# Altium PCB test pcb.PcbDoc
Units mm, origin at the board's own origin, x right, y up, seen from the top; angles counter-clockwise.
Board outline 100 x 100 mm, 2 copper layers (Top Layer, Bottom Layer); 1 components, 0 nets, 88 pads, 6 vias.
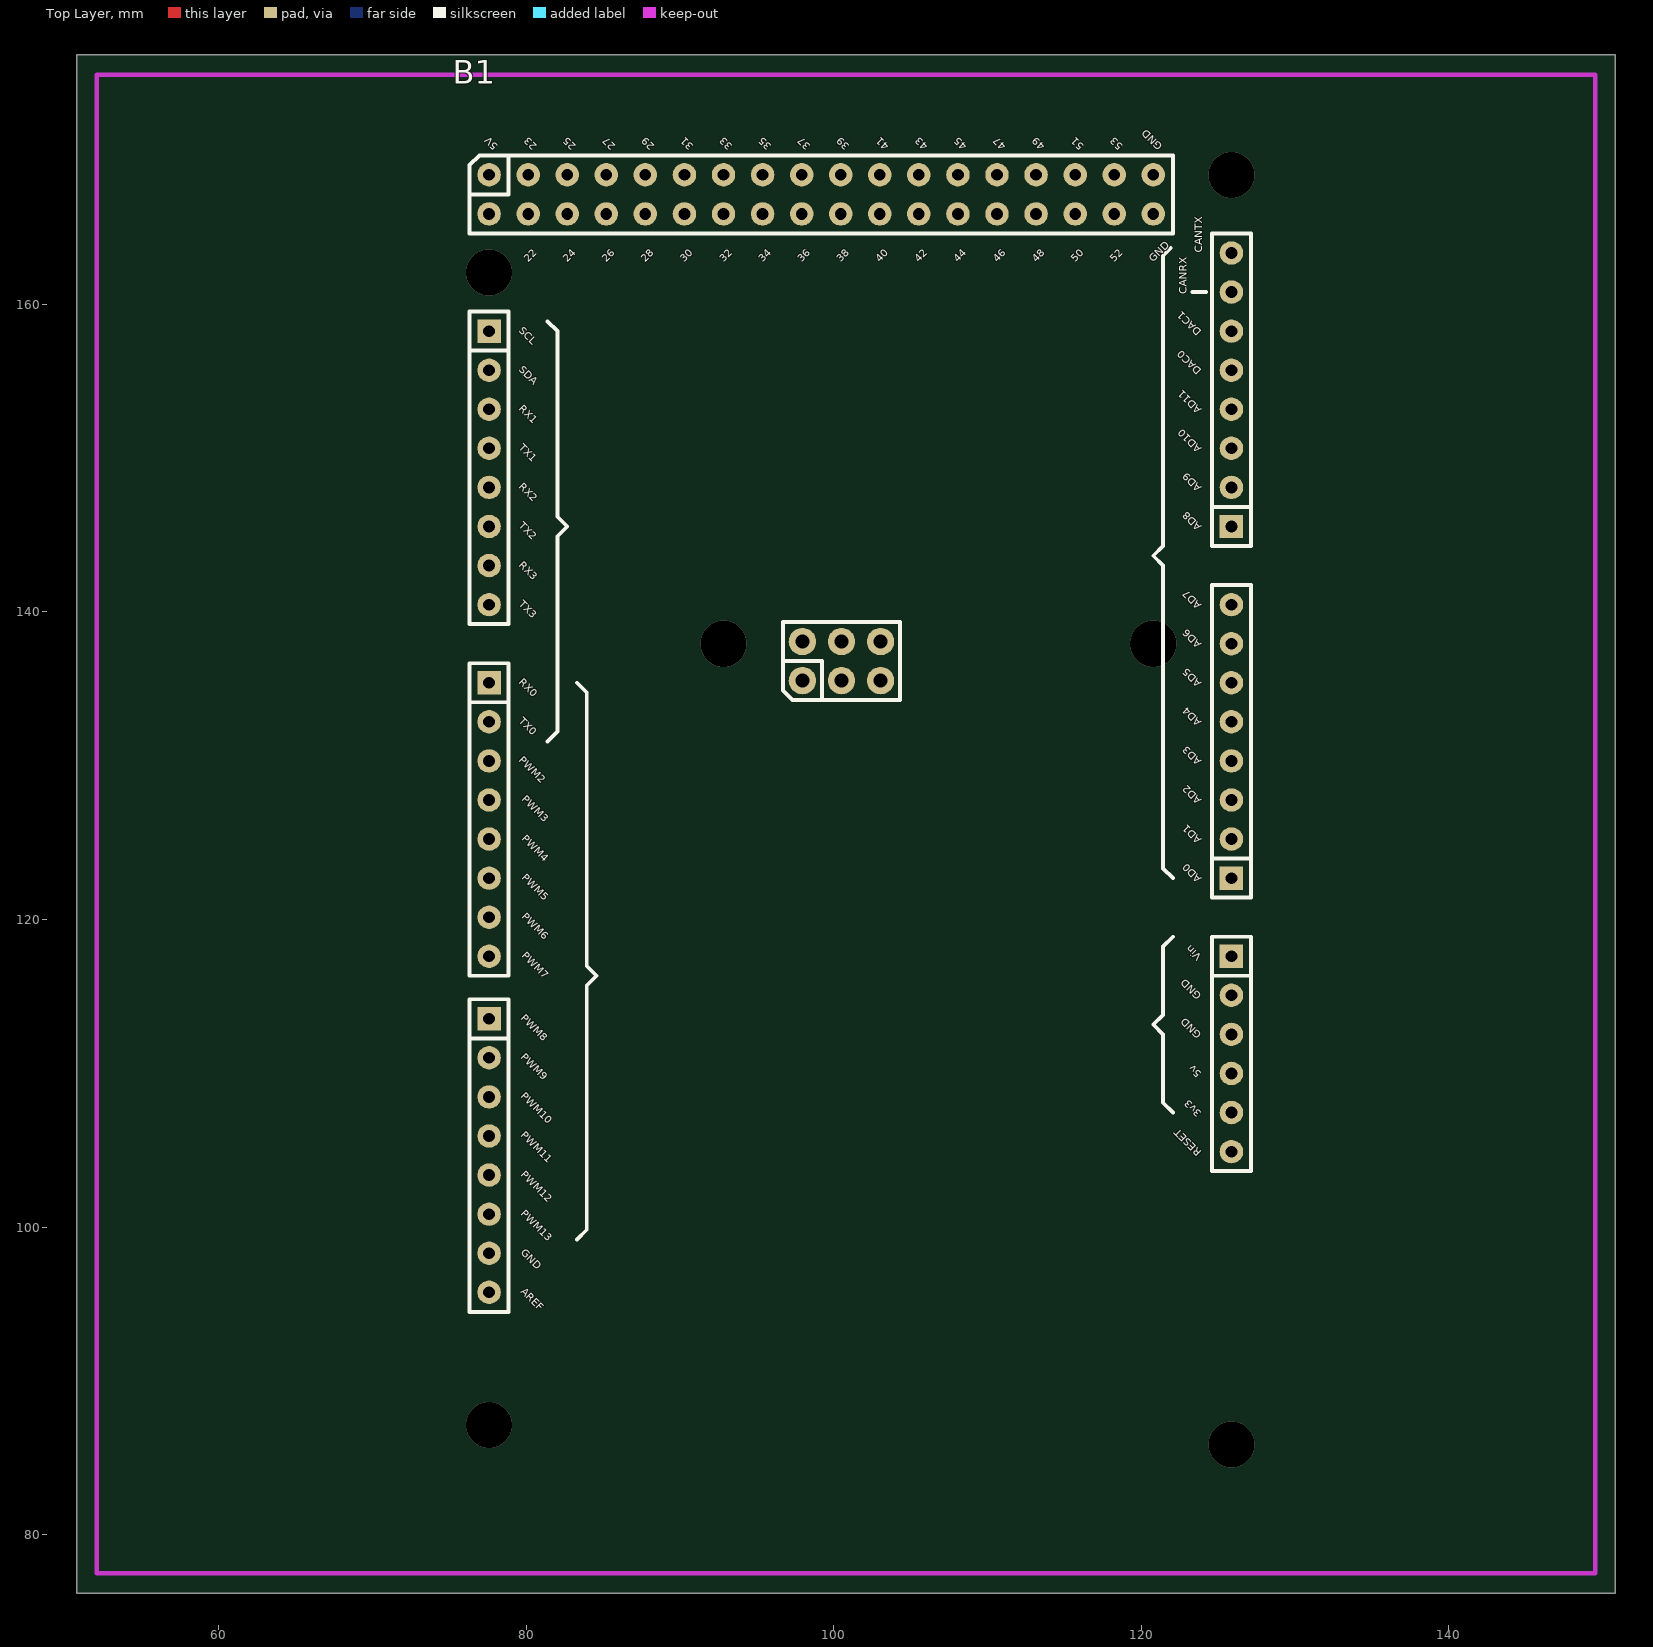
[diagram p0: Top Layer view]
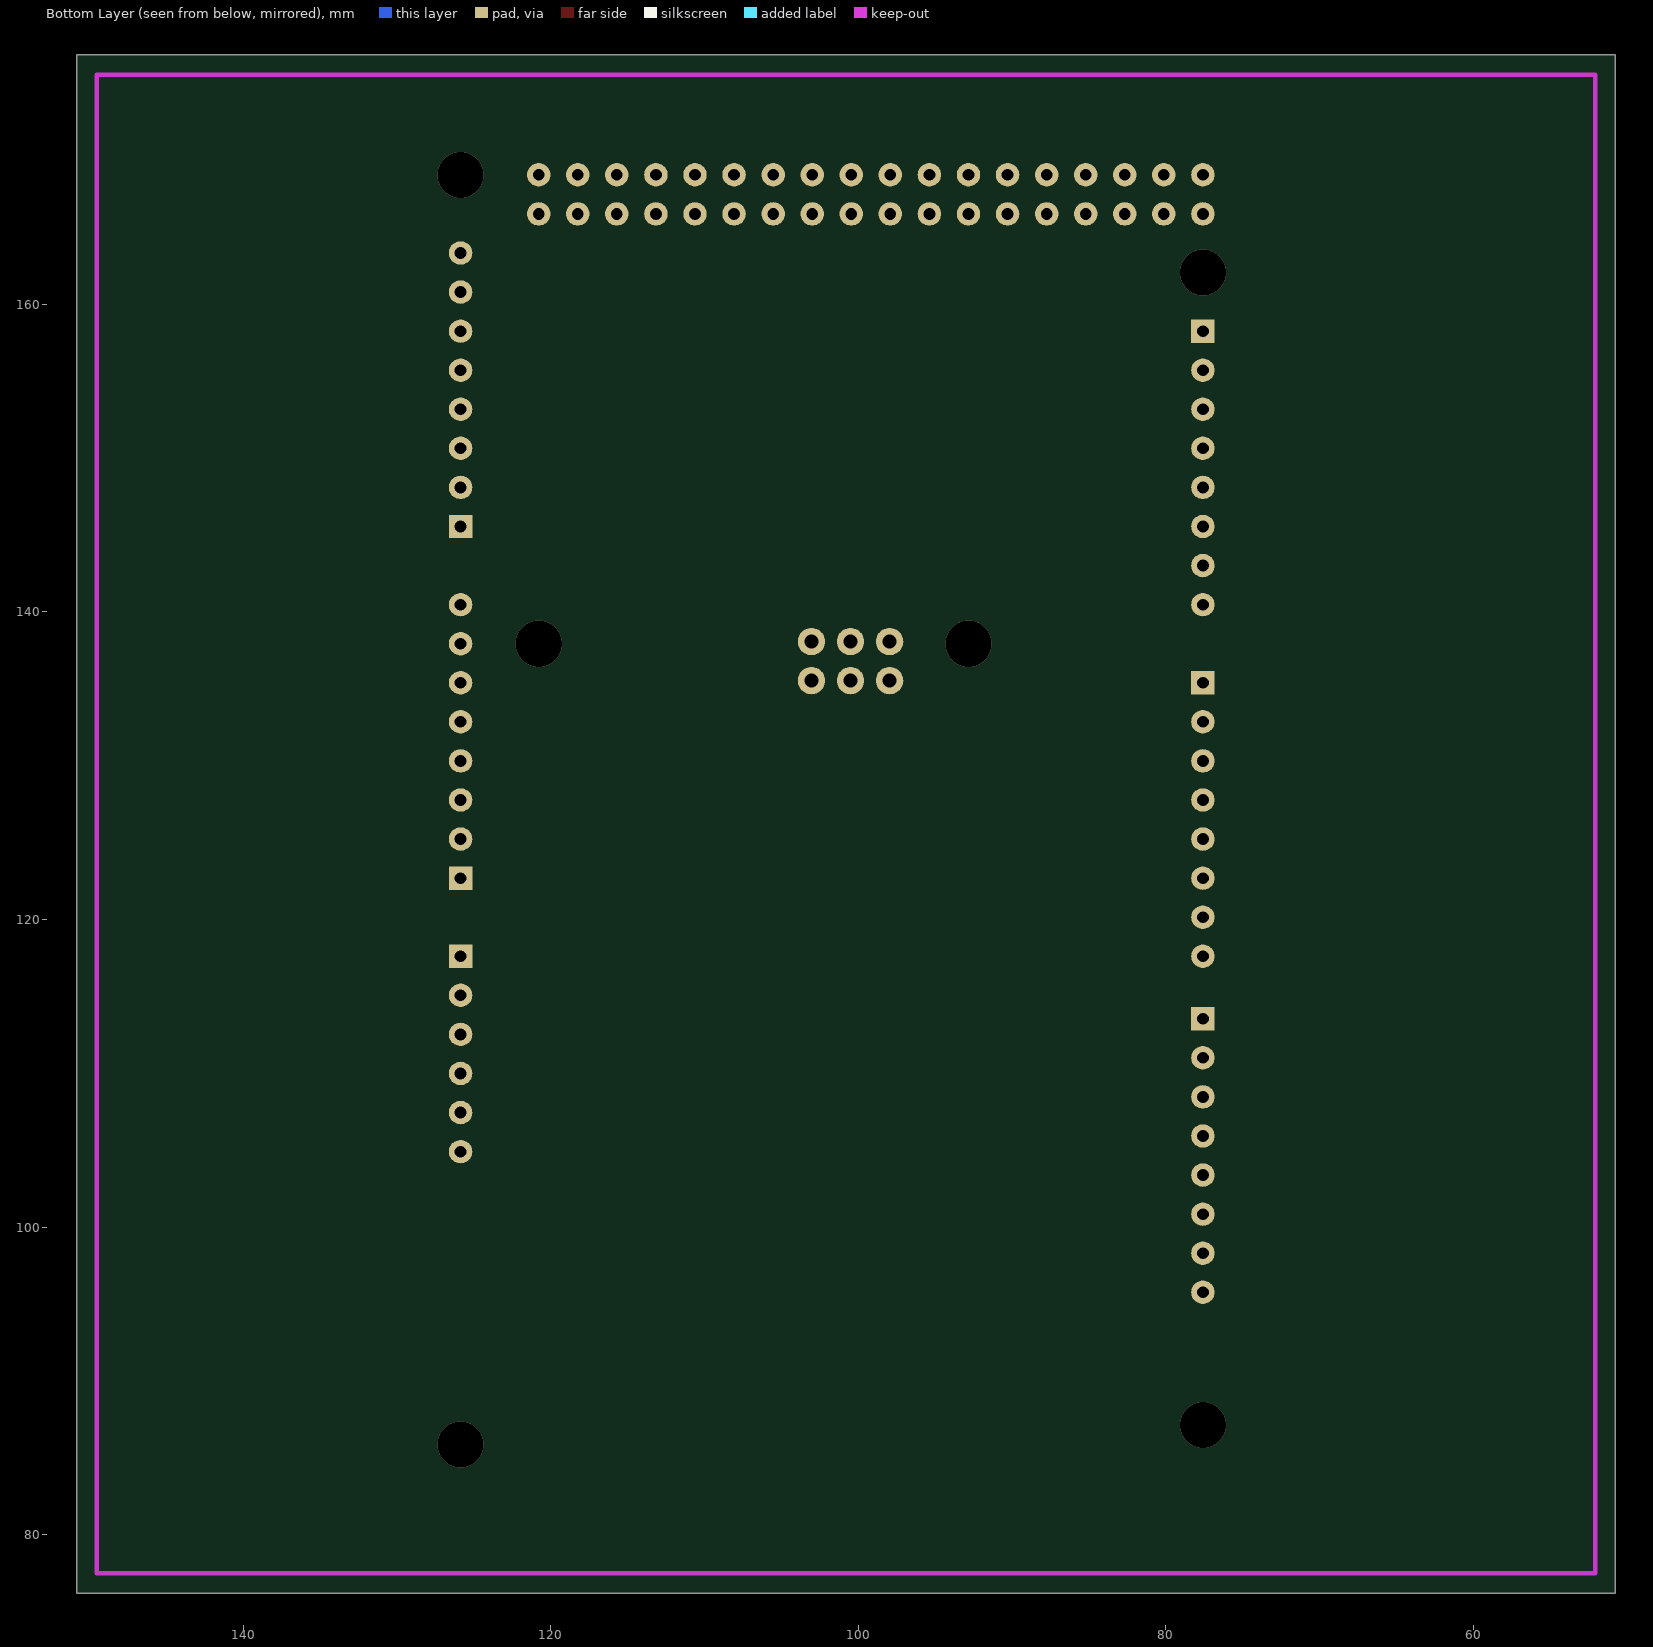
[diagram p1: Bottom Layer view, seen from below]

## Layer stack, top to bottom
Top Solder: solder mask 0.0102, Solder Resist, Dk 3.5
Top Layer: signal copper 0.0356
Dielectric 1: dielectric 0.32, FR-4, Dk 4.8
Bottom Layer: signal copper 0.0356
Bottom Solder: solder mask 0.0102, Solder Resist, Dk 3.5

## Board outline
50.8,76.2 150.8,76.2 150.8,176.2 50.8,176.2

## Design rules (kind name [scope] priority, off if disabled: settings)
Clearance [All] p1: gap=0.2 ignorepadtopadclearanceinfootprint=FALSE
PolygonConnect [All] p1: connectstyle=Relief reliefconductorwidth=0.254 reliefentries=4 polygonreliefangle="90 Angle" airgapwidth=0.254
RoutingVias [All] p1: holewidth=0.6 width=1 viastyle="Through Hole" minholewidth=0.711 minwidth=1.27 maxholewidth=0.711 maxwidth=1.27
SolderMaskExpansion [All] p1: expansion=0.102
Width [All] p1: maxlimit=0.2 minlimit=0.2 preferedwidth=0.2
30 further rules are at their usual default settings.

## Components (designator, comment, footprint, x,y, rotation, side; value= is the part's Value field where it differs from the comment)
B1 "arduino due" PCBComponent_1 101.727,132.08 r90 top

## Footprints (in the part's own frame and the unit in brackets; to place one, negate y for a bottom-side part, rotate by r counter-clockwise, add the part's x,y. Pads: shape width x height; smd on the part's side, far side on the other; paste and mask are expansions set on the pad)
PCBComponent_1 [mil]
  rect 60x60 hole 30: 0(130,950) 8(-730,950) 21(1030,950) 59(-570,-950) 60(-370,-950) 68(530,-950)
  round 60 hole 30: 1(30,950) 2(-70,950) 3(-170,950) 4(-270,950) 5(-370,950) 6(-470,950) 7(-570,950) 9(-830,950) 10(-930,950) 11(-1030,950) 12(-1130,950) 13(-1230,950) 14(330,950) 15(430,950) 16(530,950) 17(630,950) 18(730,950) 19(830,950) 20(930,950) 22(1330,850) 23(1430,850) 24(1330,750) 25(1430,750) 26(1330,650) 27(1430,650) 28(1330,550) 29(1430,550) 30(1330,450) 31(1430,450) 32(1330,350) 33(1430,350) 34(1330,250) 35(1430,250) 36(1330,150) 37(1430,150) 38(1330,50) 39(1430,50) 40(1330,-50) 41(1430,-50) 42(1330,-150) 43(1430,-150) 44(1330,-250) 45(1430,-250) 46(1330,-350) 47(1430,-350) 48(1330,-450) 49(1430,-450) 50(1330,-550) 51(1430,-550) 52(1330,-650) 53(1430,-650) 54(-1070,-950) 55(-970,-950) 56(-870,-950) 57(-770,-950) 58(-670,-950) 61(-270,-950) 62(-170,-950) 63(-70,-950) 64(30,-950) 65(130,-950) 66(230,-950) 67(330,-950) 69(630,-950) 70(730,-950) 71(830,-950) 72(930,-950) 73(1030,-950) 74(1130,-950) 75(1230,-950) 76(-1330,950) 77(-1430,950) 78(1330,-750) 79(1430,-750) 80(1330,950) 81(1430,950)
  round 70 hole 35.43: 82(135.51,148.03) 83(235.51,148.03) 84(135.51,48.03) 85(235.51,48.03) 86(135.51,-51.97) 87(235.51,-51.97)
  silkscreen extent -1480,-1000 1480,1000, body extent -1480,-1000 1480,1000, height 485

## Via types
v1: diameter 3, hole 3, Top Layer to Bottom Layer, 6 vias

## Nets (pads, with @x,y where several pads share a name; then routed paths per layer and width w, separated by ;. In a path a pad name is that pad's centre, name@x,y a point inside that pad or via, vN(x,y) a via of type N, cw(c..) or ccw(c..) an arc to the next point about the centre after c; other vN are vias at no path point)
pads on no net: B1.0 B1.1 B1.2 B1.3 B1.4 B1.5 B1.6 B1.7 B1.8 B1.9 B1.10 B1.11 B1.12 B1.13 B1.14 B1.15 B1.16 B1.17 B1.18 B1.19 B1.20 B1.21 B1.22 B1.23 B1.24 B1.25 B1.26 B1.27 B1.28 B1.29 B1.30 B1.31 B1.32 B1.33 B1.34 B1.35 B1.36 B1.37 B1.38 B1.39 B1.40 B1.41 B1.42 B1.43 B1.44 B1.45 B1.46 B1.47 B1.48 B1.49 B1.50 B1.51 B1.52 B1.53 B1.54 B1.55 B1.56 B1.57 B1.58 B1.59 B1.60 B1.61 B1.62 B1.63 B1.64 B1.65 B1.66 B1.67 B1.68 B1.69 B1.70 B1.71 B1.72 B1.73 B1.74 B1.75 B1.76 B1.77 B1.78 B1.79 B1.80 B1.81 B1.82 B1.83 B1.84 B1.85 B1.86 B1.87
copper on no net:
  other v1: 125.857,85.852 77.597,87.122 92.837,137.922 120.777,137.922 77.597,162.052 125.857,168.402

## Keep-outs
Keep-Out Layer:
  lines w0.3: 52.1,77.5 52.1,174.9 149.5,174.9 149.5,77.5 52.1,77.5

## Silkscreen, mask and mechanical layers (free items; w line width, h text height)
Drill Drawing:
  text ".LEGEND" at 155.88,81.28 h1.52
  text "Drill Drawing." at 155.88,78.74 h1.52

## Dimensions
52.1,77.5 to 52.1,174.9 on Mechanical 1
52.1,77.5 to 149.5,77.5 on Mechanical 1

## Text inside footprints (layer, text, board x,y; h text height)
B1: Top Overlay "AREF" at 79.629,95.758 h0.51 r315; Top Overlay "GND" at 79.629,98.298 h0.51 r315; Top Overlay "PWM13" at 79.629,100.838 h0.51 r315; Top Overlay "PWM12" at 79.629,103.378 h0.51 r315; Top Overlay "PWM11" at 79.629,105.918 h0.51 r315; Top Overlay "PWM10" at 79.629,108.458 h0.51 r315; Top Overlay "PWM9" at 79.629,110.998 h0.51 r315; Top Overlay "PWM8" at 79.629,113.538 h0.51 r315; Top Overlay "PWM7" at 79.682,117.602 h0.51 r315; Top Overlay "PWM6" at 79.682,120.142 h0.51 r315; Top Overlay "PWM5" at 79.682,122.682 h0.51 r315; Top Overlay "PWM4" at 79.682,125.222 h0.51 r315; Top Overlay "PWM3" at 79.682,127.762 h0.51 r315; Top Overlay "PWM2" at 79.502,130.302 h0.51 r315; Top Overlay "TX0" at 79.502,132.842 h0.51 r315; Top Overlay "TX3" at 79.502,140.462 h0.51 r315; Top Overlay "RX3" at 79.502,143.002 h0.51 r315; Top Overlay "TX2" at 79.502,145.542 h0.51 r315; Top Overlay "RX2" at 79.502,148.082 h0.51 r315; Top Overlay "TX1" at 79.502,150.622 h0.51 r315; Top Overlay "RX1" at 79.502,153.162 h0.51 r315; Top Overlay "SDA" at 79.502,155.702 h0.51 r315; Top Overlay "GND" at 121.412,170.307 h0.51 r135; Top Overlay "53" at 118.872,170.307 h0.51 r135; Top Overlay "51" at 116.332,170.307 h0.51 r135; Top Overlay "49" at 113.792,170.307 h0.51 r135; Top Overlay "47" at 111.252,170.307 h0.51 r135; Top Overlay "45" at 108.712,170.307 h0.51 r135; Top Overlay "43" at 106.172,170.307 h0.51 r135; Top Overlay "41" at 103.632,170.307 h0.51 r135; Top Overlay "39" at 101.092,170.307 h0.51 r135; Top Overlay "37" at 98.552,170.307 h0.51 r135; Top Overlay "35" at 96.012,170.307 h0.51 r135; Top Overlay "33" at 93.472,170.307 h0.51 r135; Top Overlay "31" at 90.932,170.307 h0.51 r135; Top Overlay "29" at 88.392,170.307 h0.51 r135; Top Overlay "27" at 85.852,170.307 h0.51 r135; Top Overlay "25" at 83.312,170.307 h0.51 r135; Top Overlay "23" at 80.772,170.307 h0.51 r135; Top Overlay "5V" at 78.232,170.307 h0.51 r135; Top Overlay "50" at 115.697,162.687 h0.51 r45; Top Overlay "GND" at 120.777,162.687 h0.51 r45; Top Overlay "52" at 118.237,162.687 h0.51 r45; Top Overlay "48" at 113.157,162.687 h0.51 r45; Top Overlay "46" at 110.617,162.687 h0.51 r45; Top Overlay "44" at 108.077,162.687 h0.51 r45; Top Overlay "42" at 105.537,162.687 h0.51 r45; Top Overlay "40" at 102.997,162.687 h0.51 r45; Top Overlay "38" at 100.457,162.687 h0.51 r45; Top Overlay "36" at 97.917,162.687 h0.51 r45; Top Overlay "34" at 95.377,162.687 h0.51 r45; Top Overlay "32" at 92.837,162.687 h0.51 r45; Top Overlay "30" at 90.297,162.687 h0.51 r45; Top Overlay "28" at 87.757,162.687 h0.51 r45; Top Overlay "26" at 85.217,162.687 h0.51 r45; Top Overlay "24" at 82.677,162.687 h0.51 r45; Top Overlay "22" at 80.137,162.687 h0.51 r45; Top Overlay "SCL" at 79.502,158.242 h0.51 r315; Top Overlay "RX0" at 79.502,135.382 h0.51 r315; Top Overlay "CANTX" at 123.952,163.322 h0.51 r90; Top Overlay "CANRX" at 122.936,160.655 h0.51 r90; Top Overlay "DAC1" at 123.952,158.242 h0.51 r135; Top Overlay "DAC0" at 123.952,155.702 h0.51 r135; Top Overlay "AD11" at 123.952,153.162 h0.51 r135; Top Overlay "AD10" at 123.952,150.622 h0.51 r135; Top Overlay "AD9" at 123.952,148.082 h0.51 r135; Top Overlay "AD8" at 123.952,145.542 h0.51 r135; Top Overlay "AD7" at 123.952,140.462 h0.51 r135; Top Overlay "AD6" at 123.952,137.922 h0.51 r135; Top Overlay "AD5" at 123.952,135.382 h0.51 r135; Top Overlay "AD4" at 123.952,132.842 h0.51 r135; Top Overlay "AD3" at 123.952,130.302 h0.51 r135; Top Overlay "AD2" at 123.952,127.762 h0.51 r135; Top Overlay "AD1" at 123.952,125.222 h0.51 r135; Top Overlay "AD0" at 123.952,122.682 h0.51 r135; Top Overlay "Vin" at 123.952,117.602 h0.51 r135; Top Overlay "GND" at 123.952,115.062 h0.51 r135; Top Overlay "GND" at 123.952,112.522 h0.51 r135; Top Overlay "5v" at 123.952,109.982 h0.51 r135; Top Overlay "3v3" at 123.952,107.442 h0.51 r135; Top Overlay "RESET" at 123.952,104.902 h0.51 r135